# EAGLE board esd_fall_project rev3 (EAGLE 9.6.2)
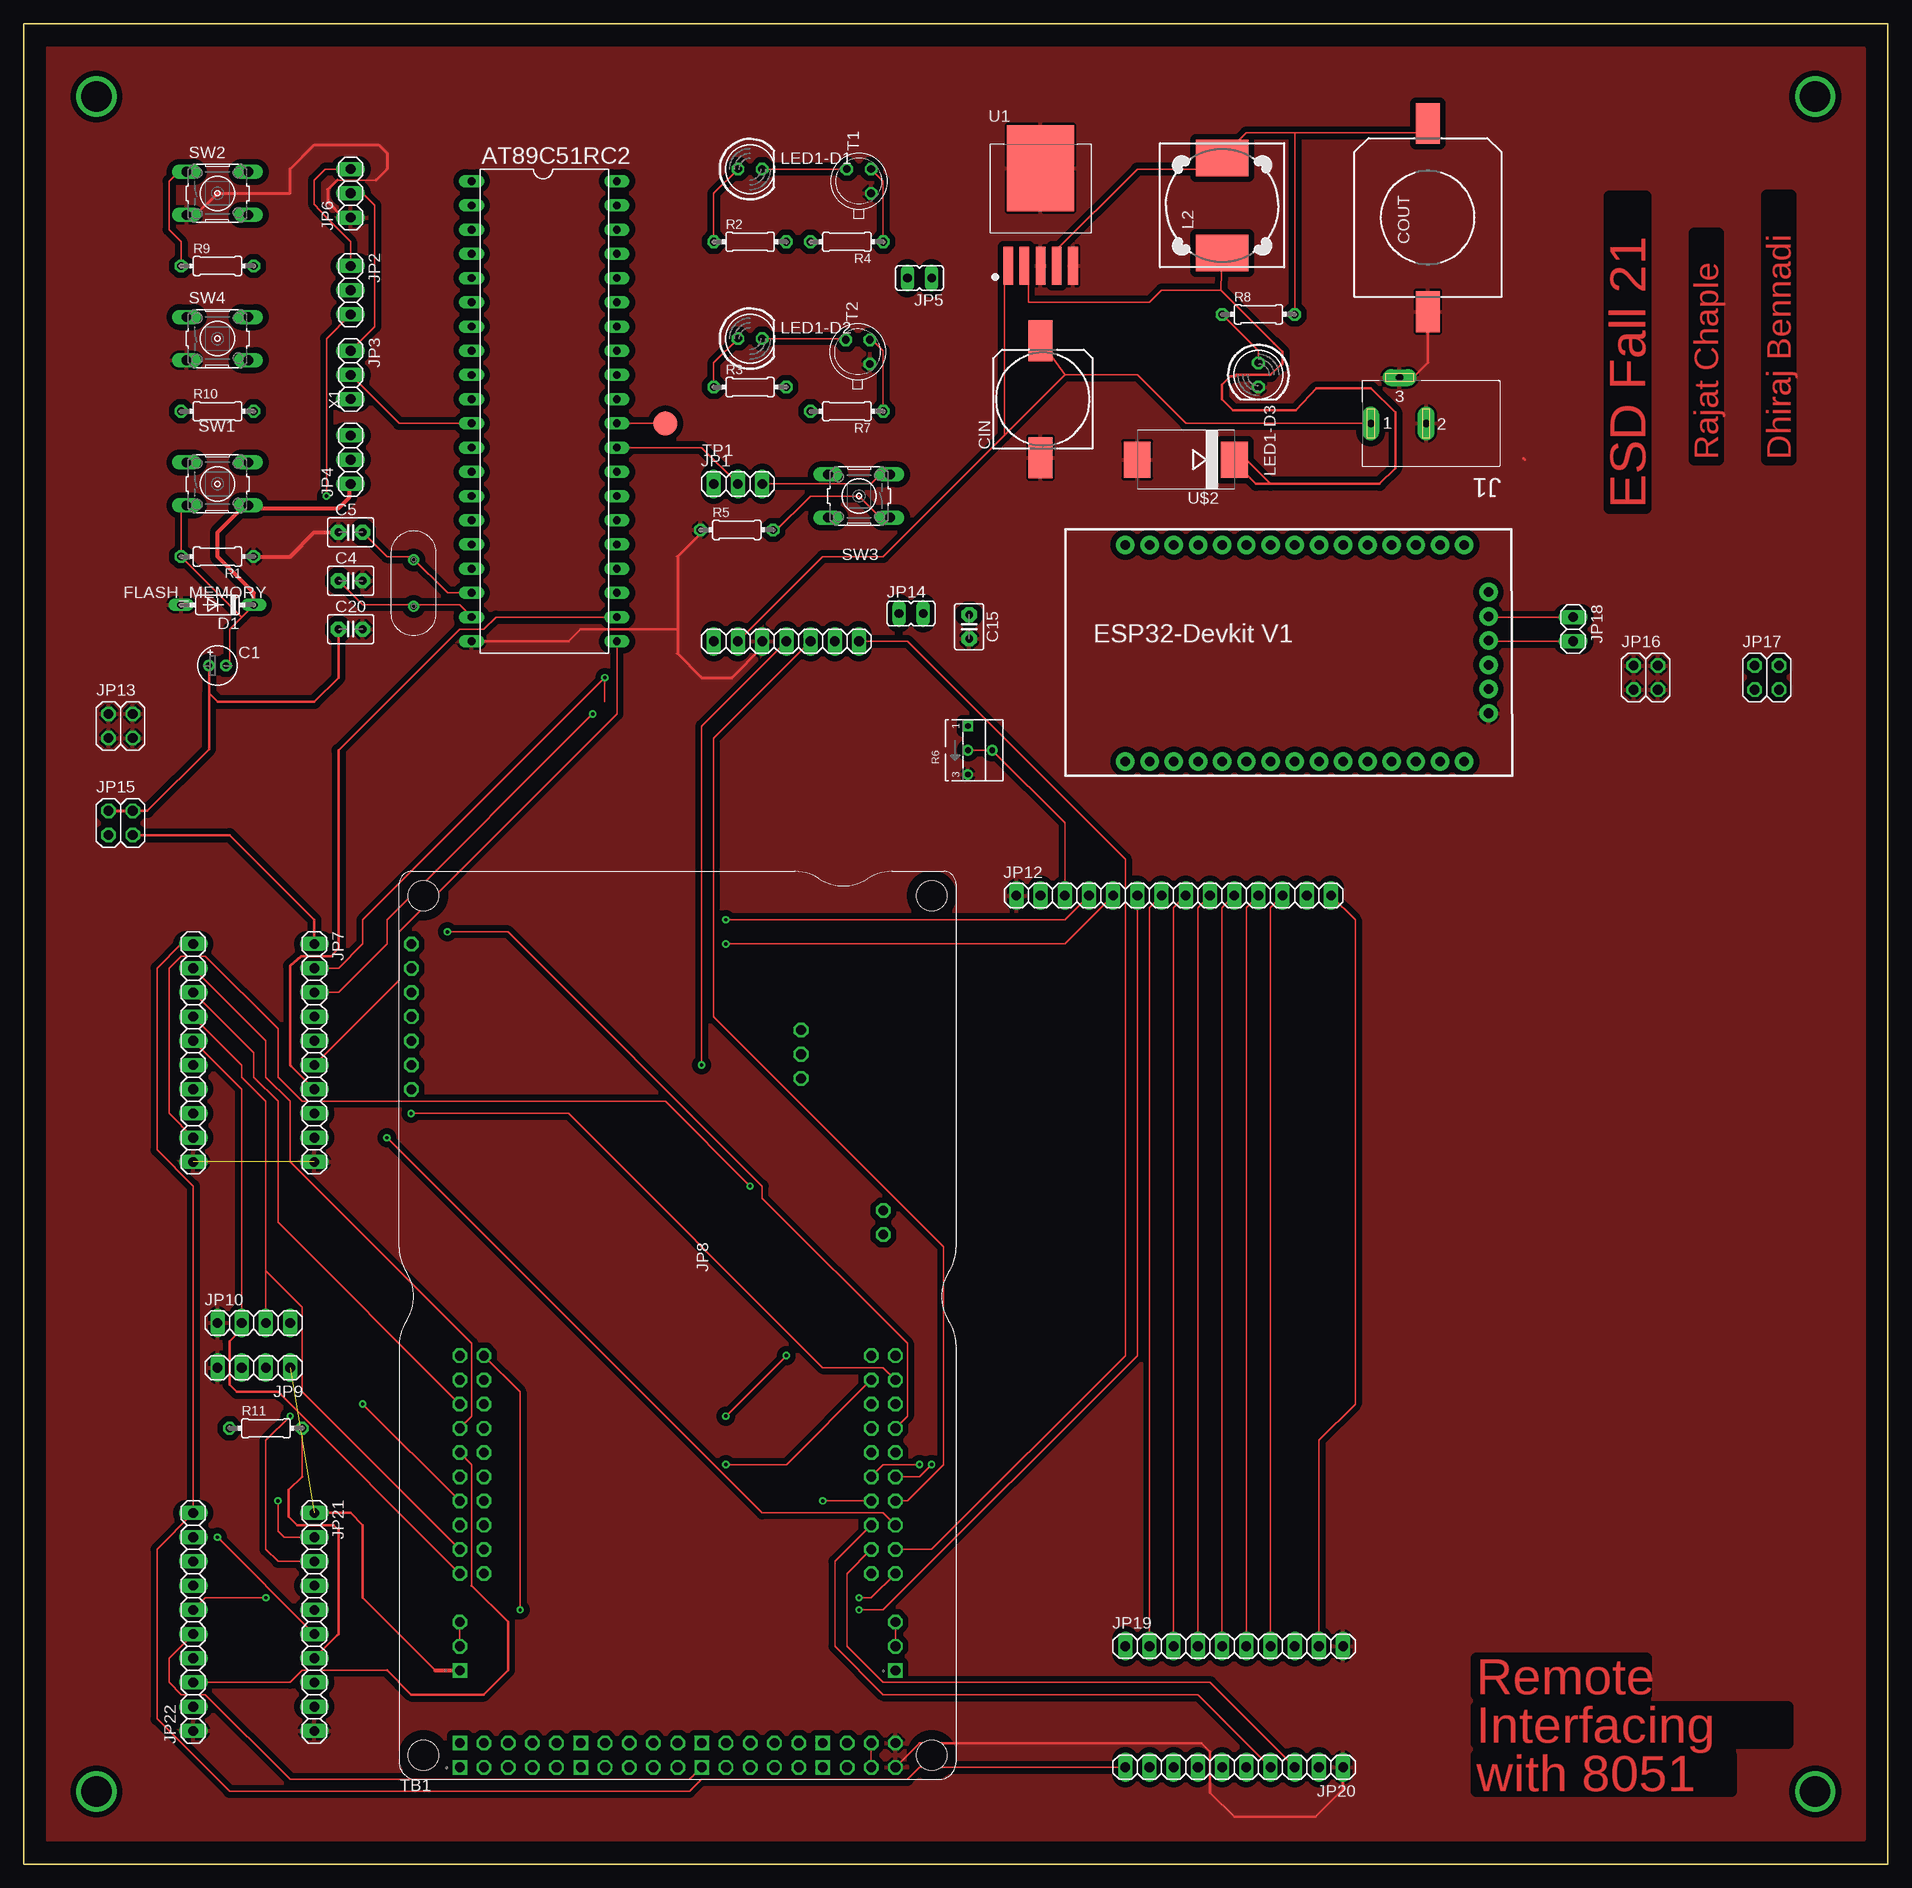
[diagram p0: board, top side]
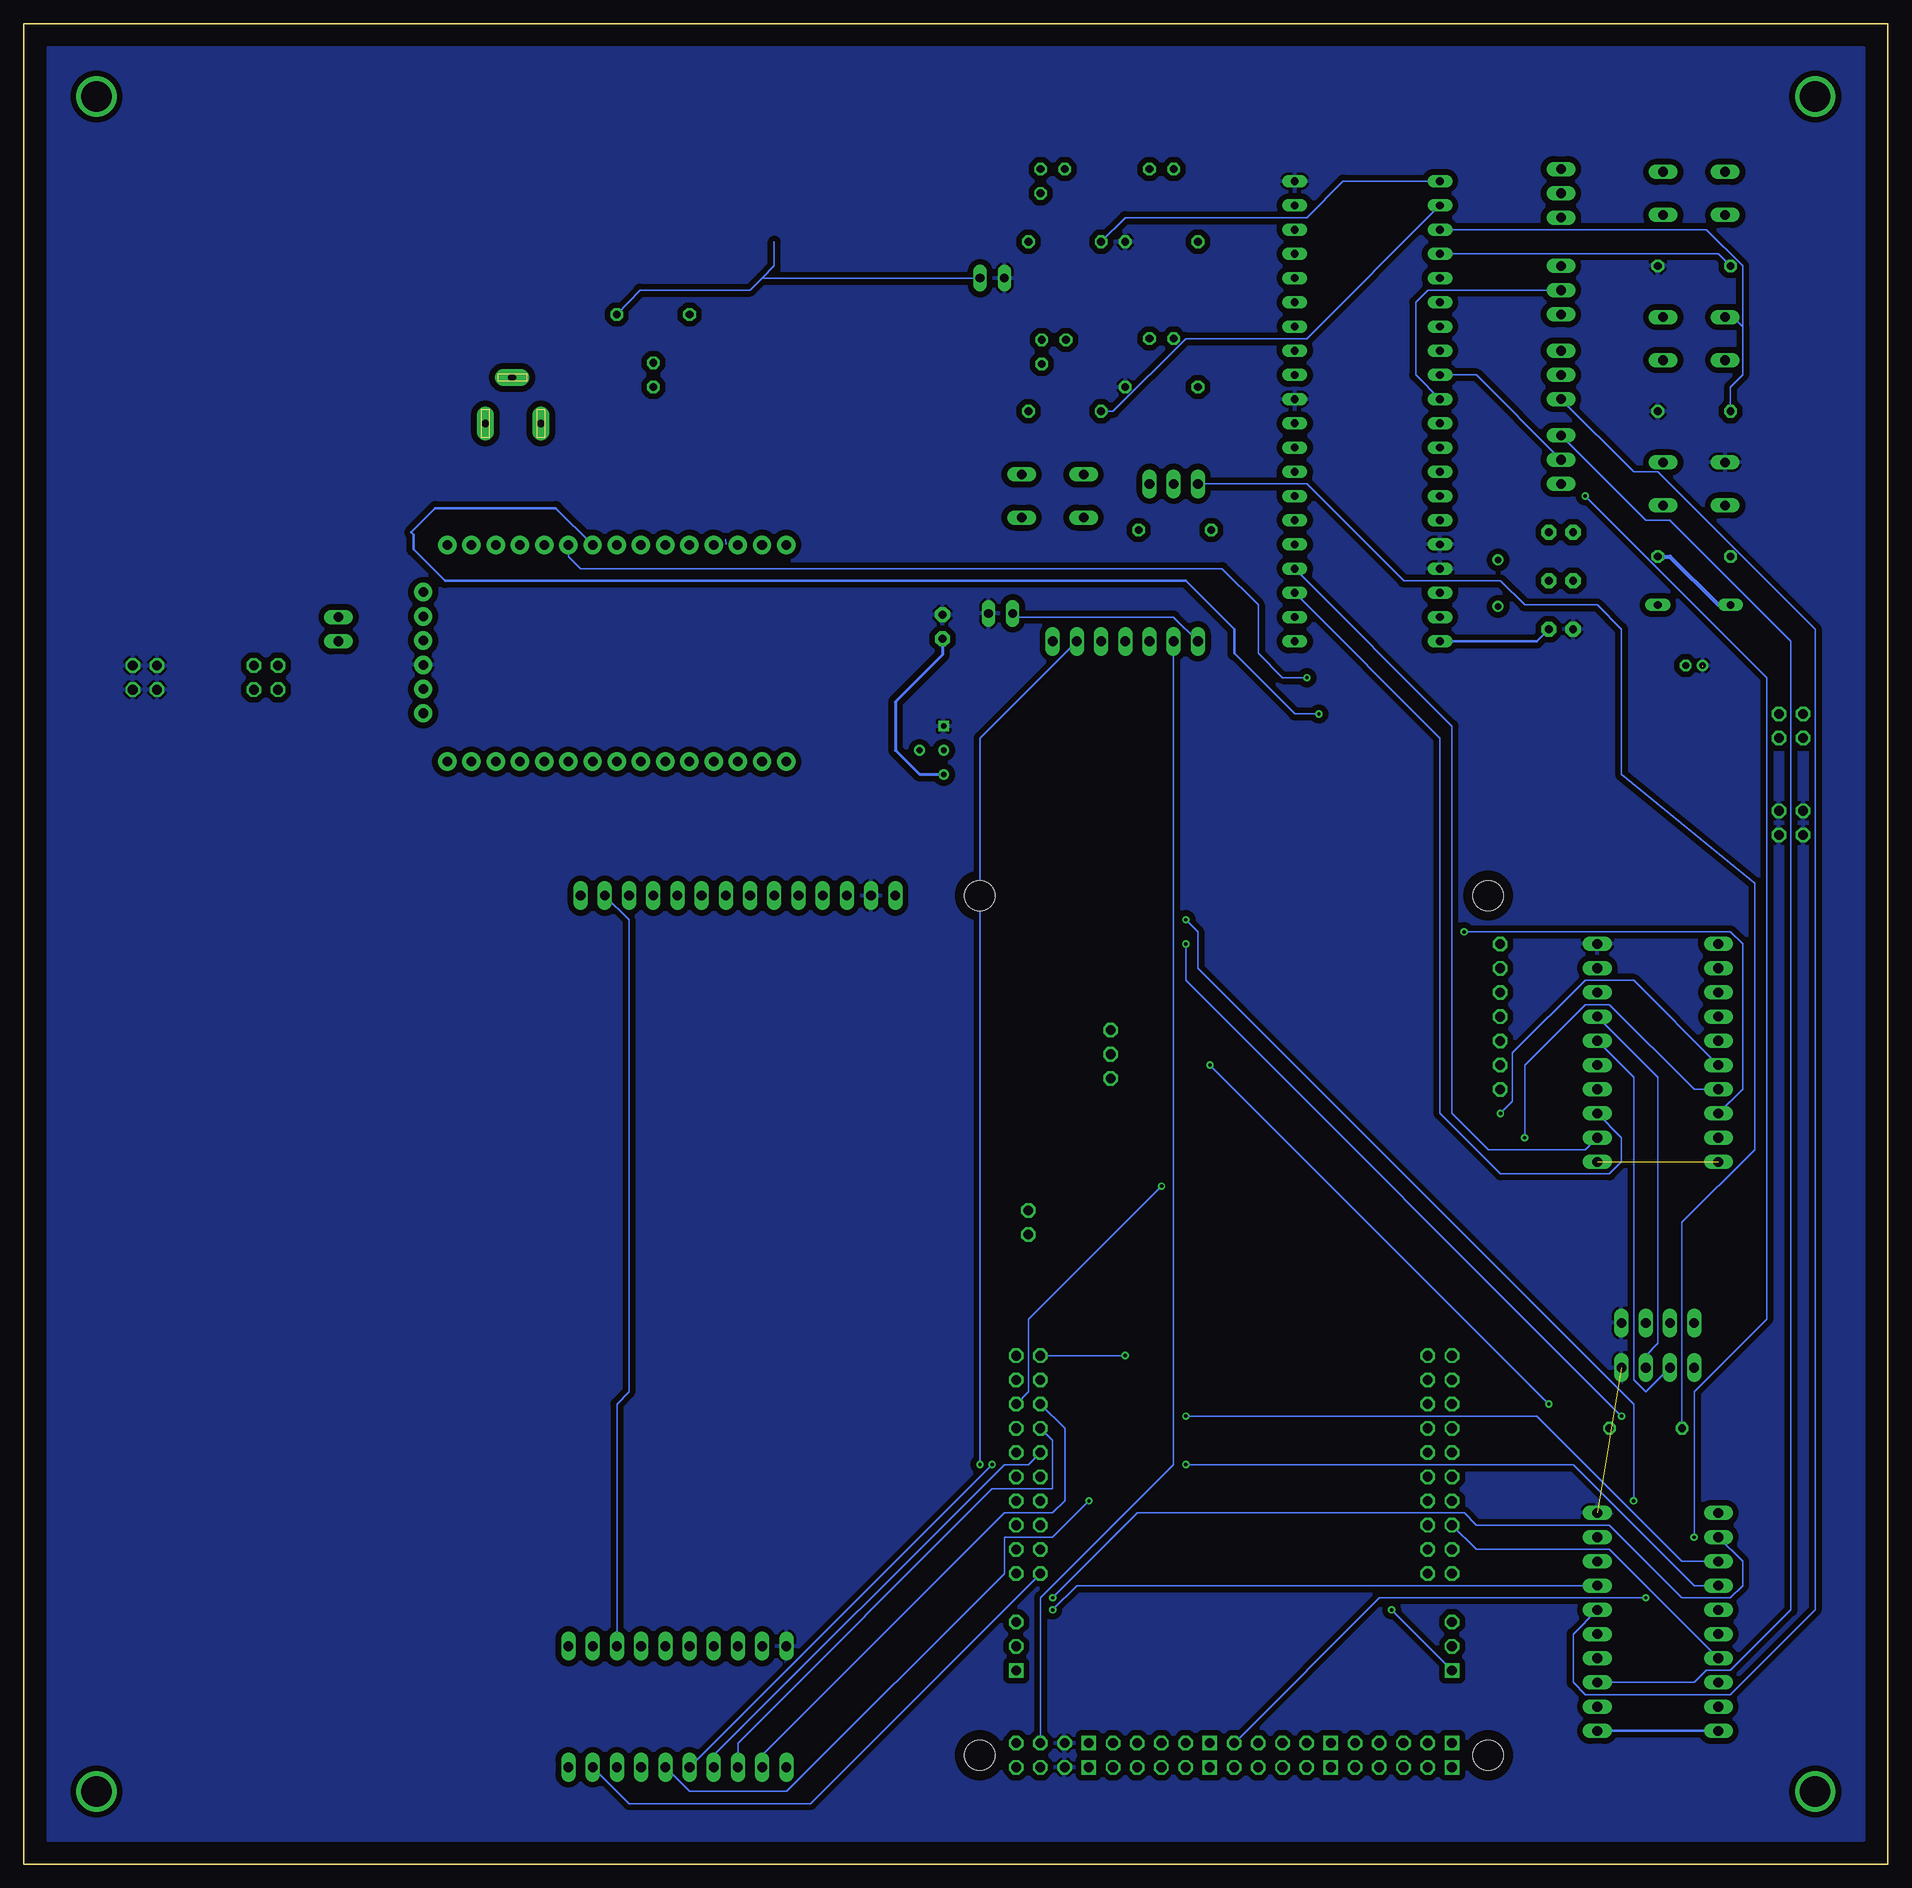
[diagram p1: board, bottom side, seen from below]

Size 195.58 x 193.04 mm. Coordinates in mm from the lower left corner, seen from the top.
Outline: 0,193.04 0,0 195.58,0 195.58,193.04 0,193.04
Copper layers (1*16): Top 0.035mm / dielectric 1.5mm / Bottom 0.035mm
Design rules "default": minimum track width 6mil, minimum drill 0.35mm, track to track 6mil, track to pad 6mil, pad to pad 6mil, via to via 6mil, smd to smd 6mil, copper to edge 40mil, drill to drill 6mil, minimum pad ring 10mil, minimum via ring 8mil, stop-mask expansion 4mil, vias tented up to drill 0mil, thermal gap 10mil
Net classes: 0 default: width 0.025 mm

## Footprints (pad centres in the part's own frame; a part is rotated, then mirrored left to right if it is on the bottom)
DIL40 = drill 0.813 long: 1 -24.13,-7.62; 2 -21.59,-7.62; 3 -19.05,-7.62; 4 -16.51,-7.62; 5 -13.97,-7.62; 6 -11.43,-7.62; 7 -8.89,-7.62; 8 -6.35,-7.62; 9 -3.81,-7.62; 10 -1.27,-7.62; 11 1.27,-7.62; 12 3.81,-7.62; 13 6.35,-7.62; 14 8.89,-7.62; 15 11.43,-7.62; 16 13.97,-7.62; 17 16.51,-7.62; 18 19.05,-7.62; 19 21.59,-7.62; 20 24.13,-7.62; 21 24.13,7.62; 22 21.59,7.62; 23 19.05,7.62; 24 16.51,7.62; 25 13.97,7.62; 26 11.43,7.62; 27 8.89,7.62; 28 6.35,7.62; 29 3.81,7.62; 30 1.27,7.62; 31 -1.27,7.62; 32 -3.81,7.62; 33 -6.35,7.62; 34 -8.89,7.62; 35 -11.43,7.62; 36 -13.97,7.62; 37 -16.51,7.62; 38 -19.05,7.62; 39 -21.59,7.62; 40 -24.13,7.62
E1,8-4 = drill 0.711 pad 1.168: + -0.889,0 | drill 0.711 pad 1.168 octagon: - 0.889,0
C2.5-3 = drill 0.813 pad 1.6 octagon: 1 -1.27,0; 2 1.27,0
153CLV-1014 = smd 4.3 x 2.5: + 4.867,0; - -7.407,0
150CLZ-1010 = smd 4.3 x 2.5: + 9.865,0; - -9.865,0
DO35-7 = drill 0.813 long: A 3.81,0; C -3.81,0
1X07 = drill 1.016 long: 1 -7.62,0; 2 -5.08,0; 3 -2.54,0; 4 0,0; 5 2.54,0; 6 5.08,0; 7 7.62,0
694106301002 = drill 0.8 pad 1.8 long: 1 13.6,0; 2 7.8,0; 3 10.6,-4.8
1X03 = drill 1.016 long: 1 -2.54,0; 2 0,0; 3 2.54,0
JP1 = drill 0.914 long: 1 0,-1.27; 2 0,1.27
1X10 = drill 1.016 long: 1 -11.43,0; 2 -8.89,0; 3 -6.35,0; 4 -3.81,0; 5 -1.27,0; 6 1.27,0; 7 3.81,0; 8 6.35,0; 9 8.89,0; 10 11.43,0
1X04 = drill 1.016 long: 1 -3.81,0; 2 -1.27,0; 3 1.27,0; 4 3.81,0
1X14 = drill 1.016 long: 1 -16.51,0; 2 -13.97,0; 3 -11.43,0; 4 -8.89,0; 5 -6.35,0; 6 -3.81,0; 7 -1.27,0; 8 1.27,0; 9 3.81,0; 10 6.35,0; 11 8.89,0; 12 11.43,0; 13 13.97,0; 14 16.51,0
2X02 = drill 1.016 octagon: 1 -1.27,-1.27; 2 -1.27,1.27; 3 1.27,-1.27; 4 1.27,1.27
1X02 = drill 1.016 long: 1 -1.27,0; 2 1.27,0
DR127 = smd 3.85 x 5.5: 1 -4.975,0; 2 4.975,0
LED5MM = drill 0.813 octagon: A -1.27,0; K 1.27,0
0204/7 = drill 0.813 octagon: 1 -3.81,0; 2 3.81,0
64W = drill 0.6 square: 1 2.54,0 | drill 0.6: 3 -2.54,0; S 0,-2.54; S@1 0,0
B3F-10XX = drill 1.016 long: 1 -3.251,2.261; 2 3.251,2.261; 3 -3.251,-2.261; 4 3.251,-2.261
TO18 = drill 0.813 octagon: 1 -1.27,-1.27; 2 1.27,-1.27; 3 1.27,1.27
SHIELD_MSP-EXP432P401R = drill 1.016 octagon: 1 0.02,43.17; 2 0.02,40.63; 3 0.02,38.09; 4 0.02,35.55; 5 0.02,33.01; 5_3 2.56,-0.01; 5_4 2.56,2.53; 5_5 5.1,-0.01; 5_6 5.1,2.53; 5_7 7.64,-0.01; 5_8 7.64,2.53; 5_9 10.18,-0.01; 5_10 10.18,2.53; 5_13 15.26,-0.01; 5_14 15.26,2.53; 5_15 17.8,-0.01; 5_16 17.8,2.53; 5_17 20.34,-0.01; 5_18 20.34,2.53; 5_19 22.88,-0.01; 5_20 22.88,2.53; 5_23 27.96,-0.01; 5_24 27.96,2.53; 5_25 30.5,-0.01; 5_26 30.5,2.53; 5_27 33.04,-0.01; 5_28 33.04,2.53; 5_29 35.58,-0.01; 5_30 35.58,2.53; 5_33 40.66,-0.01; 5_34 40.66,2.53; 5_35 43.2,-0.01; 5_36 43.2,2.53; 5_37 45.74,-0.01; 5_38 45.74,2.53; 6 0.02,30.47; 6_2 45.74,12.69; 6_3 45.74,15.23; 7 0.02,27.93; 7_2 0.02,12.69; 7_3 0.02,15.23; 8 0.02,25.39; 9 0.02,22.85; 10 0.02,20.31; 11 45.74,20.31; 12 45.74,22.85; 13 45.74,25.39; 14 45.74,27.93; 15 45.74,30.47; 16 45.74,33.01; 17 45.74,35.55; 18 45.74,38.09; 19 45.74,40.63; 20 45.74,43.17; 21 2.56,43.17; 22 2.56,40.63; 23 2.56,38.09; 24 2.56,35.55; 25 2.56,33.01; 26 2.56,30.47; 27 2.56,27.93; 28 2.56,25.39; 29 2.56,22.85; 30 2.56,20.31; 31 43.2,20.31; 32 43.2,22.85; 33 43.2,25.39; 34 43.2,27.93; 35 43.2,30.47; 36 43.2,33.01; 37 43.2,35.55; 38 43.2,38.09; 39 43.2,40.63; 40 43.2,43.17; 102_1 44.47,58.41; 102_2 44.47,55.87; TP101 -5.05,86.35; TP102 -5.05,83.81; TP103 -5.05,81.27; TP104 -5.05,78.73; TP105 -5.05,76.19; TP106 -5.05,73.65; TP107 -5.05,71.11; TP108 35.83,77.33; TP109 35.83,74.79; TP110 35.83,72.25 | drill 1.016 square: 5_1 0.02,-0.01; 5_2 0.02,2.53; 5_11 12.72,-0.01; 5_12 12.72,2.53; 5_21 25.42,-0.01; 5_22 25.42,2.53; 5_31 38.12,-0.01; 5_32 38.12,2.53; 6_1 45.74,10.15; 7_1 0.02,10.15 | hole 3.175: -3.79,91.43; 49.55,91.43; -3.79,1.26; 49.55,1.26
B2,54 = smd 2.54 x 2.54: TP 0,0
DPAK6P170_1524X459L254X81N = smd 1 x 4: 1 -3.4,-6.33; 2 -1.7,-6.33; 3 0,-6.33; 4 1.7,-6.33; 5 3.4,-6.33 | smd 7 x 9: 6 0,3.91
ESP32-DEVKITV1 = drill 1 pad 1.93: 3V -20.33,12.627; BAT -22.87,-10.111; GND1 -22.87,12.627; GND2 -25.41,7.547; IO0 -15.25,-10.111; IO2 -17.79,-10.111; IO4 -12.71,-10.111; IO5 -5.09,-10.111; IO12 -15.25,12.627; IO13 -17.79,12.627; IO14 -12.71,12.627; IO15 -20.33,-10.111; IO16 -10.17,-10.111; IO17 -7.63,-10.111; IO18 -2.55,-10.111; IO19 -0.01,-10.111; IO21 2.53,-10.111; IO22 10.15,-10.111; IO23 12.69,-10.111; IO25 -5.09,12.627; IO26 -7.63,12.627; IO27 -10.17,12.627; IO32 -0.01,12.627; IO33 -2.55,12.627; IO34 5.07,12.627; IO35 2.53,12.627; IO36 10.15,12.627; IO39 7.61,12.627; NC1 -25.41,5.007; NC2 -25.41,-5.153; RST 12.69,12.627; RX0 -25.41,-0.073; RX1 5.07,-10.111; TX0 -25.41,-2.613; TX1 7.61,-10.111; V+ -25.41,2.467
SMC = smd 2.8 x 3.8: A 5.097,0; C -5.097,0
XTAL_HC49 = drill 0.65 pad 1.05: 1 -2.44,0; 2 2.44,0

## Placement (x,y rotation side)
AT89C51RC2  8051P  [DIL40]  54.61,152.4 270 top
C1  [E1,8-4]  20.32,125.73 0 top
C4  27pF  [C2.5-3]  34.29,134.62 0 top
C5  27pF  [C2.5-3]  34.29,139.7 0 top
C15  0.1uF  [C2.5-3]  99.19,129.79 270 top
C20  4.7uF  [C2.5-3]  34.29,129.54 0 top
CIN  100UF  [153CLV-1014]  106.68,154.94 90 top
COUT  1000UF  [150CLZ-1010]  147.32,172.72 90 top
D1  1N4148DO35-7  [DO35-7]  20.32,132.08 180 top
FLASH_MEMORY  [1X07]  80.01,128.27 180 top
J1  694106301002  [694106301002]  154.94,151.13 180 top
JP1  [1X03]  74.93,144.78 0 top
JP2  [1X03]  34.29,165.1 270 top
JP3  [1X03]  34.29,156.21 270 top
JP4  [1X03]  34.29,147.32 90 top
JP5  [JP1]  93.98,166.37 90 top
JP6  [1X03]  34.29,175.26 90 top
JP7  [1X10]  30.48,85.09 270 top
JP8  [1X10]  17.78,85.09 90 top
JP9  [1X04]  24.13,52.07 180 top
JP10  [1X04]  24.13,56.77 0 top
JP12  [1X14]  120.65,101.6 0 top
JP13  [2X02]  10.16,119.38 0 top
JP14  [JP1]  93.09,131.19 270 top
JP15  [2X02]  10.16,109.22 0 top
JP16  [2X02]  170.18,124.46 0 top
JP17  [2X02]  182.88,124.46 0 top
JP18  [1X02]  162.56,129.54 270 top
JP19  [1X10]  127,22.86 0 top
JP20  [1X10]  127,10.16 180 top
JP21  [1X10]  30.48,25.4 270 top
JP22  [1X10]  17.78,25.4 90 top
L2  100uH  [DR127]  125.73,173.99 90 top
LED1-D1  [LED5MM]  76.2,177.8 0 top
LED1-D2  [LED5MM]  76.2,160.02 0 top
LED1-D3  [LED5MM]  129.54,156.21 270 top
R1  330  [0204/7]  20.32,137.16 180 top
R2  330  [0204/7]  76.2,170.18 0 top
R3  330  [0204/7]  76.2,154.94 0 top
R4  5kohm  [0204/7]  86.36,170.18 180 top
R5  330  [0204/7]  74.8,139.95 0 top
R6  20K  [64W]  99.06,116.84 90 top
R7  5kohm  [0204/7]  86.36,152.4 180 top
R8  330  [0204/7]  129.54,162.56 0 top
R9  4.7k  [0204/7]  20.32,167.64 0 top
R10  4.7k  [0204/7]  20.32,152.4 0 top
R11  330  [0204/7]  25.4,45.72 0 top
SW1  SPST  [B3F-10XX]  20.32,144.78 0 top
SW2  SPST  [B3F-10XX]  20.32,175.26 0 top
SW3  SPST  [B3F-10XX]  87.63,143.51 180 top
SW4  SPST  [B3F-10XX]  20.32,160.02 0 top
T1  2N2222  [TO18]  87.63,176.53 90 top
T2  2N2222  [TO18]  87.5,158.62 90 top
TB1  MSP-EXP432P401R  [SHIELD_MSP-EXP432P401R]  45.72,10.16 0 top
TP1  PTR1B2,54  [B2,54]  67.31,151.13 0 top
U1  LM2576-5.0WU  [DPAK6P170_1524X459L254X81N]  106.68,173.99 0 top
U$1  ESP32DEVKITV1  [ESP32-DEVKITV1]  128.27,128.27 180 top
U$2  SL42-SCHOTTKY  [SMC]  121.92,147.32 180 top
X1  49S/18PF  [XTAL_HC49]  40.89,134.37 270 top

## Library data of the parts
AT89C51RC2 = micro-intel; OC_FARNELL: unknown; OC_NEWARK: unknown
C1 R1-R5 R7-R11 = rcl
C4 C5 C15 C20 = capacitor-wima
CIN COUT U$2 = ESD_project
D1 = diode
FLASH_MEMORY JP1-JP4 JP6-JP10 JP12 JP13 JP15-JP22 = pinhead
J1 = DC Power Jacks; CREATED_BY: PCBLayout.com; DIGIKEY_PART_NUMBER: 732-5930-ND; MANUFACTURER: Wurth Electronics Inc.; MPN: 694106301002
JP5 JP14 = jumper
L2 = inductors
LED1-D1-LED1-D3 = led
R6 = potentiometers
SW1-SW4 = switch-omron; MPN: B3F-1000; OC_FARNELL: 176432; OC_NEWARK: 36M3542
T1 T2 = transistor
TB1 = msp432; AVAILABILITY: In Stock; DESCRIPTION: SimpleLink™ MSP432P401R high-precision ADC LaunchPad™ Development Kit; MF: Texas Instruments; MP: MSP-EXP432P401R; PACKAGE: None; PRICE: None; PURCHASE-URL: https://pricing.snapeda.com/search/part/MSP-EXP432P401R/?ref=eda
TP1 = testpad
U1 = LM2576-5.0WU; AVAILABILITY: In Stock; DESCRIPTION: Buck Switching Regulator IC Positive Fixed 5V 1 Output 3A TO-263-6, D²Pak (5 Leads + Tab), TO-263BA; MF: Microchip; MP: LM2576-5.0WU-TR; PACKAGE: TO-263-5 Microchip; PRICE: None; PURCHASE-URL: https://pricing.snapeda.com/search/part/LM2576-5.0WU-TR/?ref=eda
U$1 = ESP32-DEVKITV1
X1 = Crystals_Oscillators; CREATED_BY: PCBLayout.com; MANUFACTURER: Xinhunjing; MPN: 49S/18PF; PACKAGE: SMD

## Nets
3.3V: JP8.10 JP20.10 JP22.10
3V3: TB1.6_1
5V: TB1.7_1 TB1.21
9: AT89C51RC2.9 JP4.2
/PSEN_CMOS: JP21.7 R11.2
/PSEN_TTL: JP22.4 TB1.8
ALE: AT89C51RC2.30 TP1.TP
ESP32_RX_CMOS: JP7.2 U$1.IO16
ESP32_RX_TTL: JP8.9 TB1.4
ESP32_TX_CMOS: JP7.3 U$1.IO17
ESP32_TX_TTL: JP8.8 TB1.3
FLASH_CS: FLASH_MEMORY.1 TB1.12
GND: AT89C51RC2.20 C4.2 C5.1 C15.2 C20.2 CIN.- COUT.- D1.A FLASH_MEMORY.5 J1.2 J1.3 JP6.1 JP7.10 JP8.1 JP9.4 JP10.1 JP12.1 JP13.1 JP13.2 JP13.3 JP13.4 JP16.1 JP16.2 JP16.3 JP16.4 JP19.10 JP20.1 JP21.10 JP22.1 LED1-D3.K R1.1 R5.1 R6.3 SW2.3 SW4.3 T1.1 T2.1 TB1.5_37 TB1.5_38 U1.3 U1.5 U1.6 U$1.GND2 U$2.A
GND_6: TB1.6_2 TB1.6_3
GND_7: TB1.7_2 TB1.7_3
GND_J3: TB1.22
GPIO0_CMOS: AT89C51RC2.21 JP7.6
GPIO0_TTL: JP8.5 TB1.19
GPIO1_CMOS: AT89C51RC2.22 JP7.7
GPIO1_TTL: JP8.4 TB1.13
GPIO2_CMOS: AT89C51RC2.23 JP7.8
GPIO2_TTL: JP8.3 TB1.17
GPIO3_CMOS: AT89C51RC2.24 JP7.9
GPIO3_TTL: JP8.2 TB1.18
LCD_D0_CMOS: JP12.7 JP19.2
LCD_D0_TTL: JP20.9 TB1.38
LCD_D1_CMOS: JP12.8 JP19.3
LCD_D1_TTL: JP20.8 TB1.37
LCD_D2_CMOS: JP12.9 JP19.4
LCD_D2_TTL: JP20.7 TB1.36
LCD_D3_CMOS: JP12.10 JP19.5
LCD_D3_TTL: JP20.6 TB1.35
LCD_D4_CMOS: JP12.11 JP19.6
LCD_D4_TTL: JP20.5 TB1.34
LCD_D5_CMOS: JP12.12 JP19.7
LCD_D5_TTL: JP20.4 TB1.33
LCD_D6_CMOS: JP12.13 JP19.8
LCD_D6_TTL: JP20.3 TB1.32
LCD_D7_CMOS: JP12.14 JP19.9
LCD_D7_TTL: JP20.2 TB1.31
LCD_E_CMOS: JP12.6 JP21.4
LCD_E_TTL: JP22.7 TB1.39
LCD_RS_CMOS: JP12.4 JP21.2
LCD_RS_TTL: JP22.9 TB1.11
LCD_RW_CMOS: JP12.5 JP21.3
LCD_RW_TTL: JP22.8 TB1.40
LED0: AT89C51RC2.1 R4.2
LED1: AT89C51RC2.2 R7.2
MISO: FLASH_MEMORY.3 TB1.14
MOSI: FLASH_MEMORY.2 TB1.15
N$1: R7.1 T2.2
N$2: LED1-D2.A R3.1
N$3: COUT.+ JP5.1 L2.2 R8.2 U1.4
N$4: L2.1 U1.2 U$2.C
N$5: JP2.1 JP6.3
N$6: JP3.1 JP6.2
N$7: R4.1 T1.2
N$8: AT89C51RC2.19 C4.1 X1.2
N$9: AT89C51RC2.18 C5.2 X1.1
N$10: LED1-D1.A R2.1
N$11: LED1-D3.A R8.1
N$13: AT89C51RC2.29 JP1.2
N$14: JP18.2 U$1.RX0
N$15: LED1-D1.K T1.3
N$16: JP18.1 U$1.TX0
N$17: LED1-D2.K T2.3
N$18: FLASH_MEMORY.7 JP14.1
N$23: TB1.20
N$35: R5.2 SW3.1
N$36: JP1.3 SW3.3
N$365: JP1.1 R11.1
RST: C1.- D1.C JP4.1 R1.2 SW1.3
RST51_CMOS: JP4.3 JP21.8
RST51_TTL: JP22.3 TB1.5
RXD: AT89C51RC2.10 JP2.2
SCK_CMOS: JP7.4 JP9.2
SCK_TTL: JP8.7 JP10.3 TB1.9
SCLK: FLASH_MEMORY.4 TB1.7
SDA_CMOS: JP7.5 JP9.3
SDA_TTL: JP8.6 JP10.2 TB1.10
SW0: AT89C51RC2.3 R10.1 SW4.1
SW1: AT89C51RC2.4 R9.1 SW2.1
TXD: AT89C51RC2.11 JP3.2
UART51_RX_CMOS: JP3.3 JP21.5
UART51_RX_TTL: JP22.6 TB1.5_20
UART51_TX_CMOS: JP2.3 JP21.6
UART51_TX_TTL: JP22.5 TB1.5_21
V_RES: JP12.3 R6.S R6.S@1
VCC: AT89C51RC2.16 AT89C51RC2.17 AT89C51RC2.31 AT89C51RC2.40 C1.+ C15.1 C20.1 JP5.2 JP7.1 JP9.1 JP10.4 JP12.2 JP14.2 JP15.1 JP15.2 JP15.3 JP15.4 JP17.1 JP17.2 JP17.3 JP17.4 JP19.1 JP21.1 R2.2 R3.2 R6.1 R9.2 R10.2 SW1.1 TB1.5_33 TB1.5_34 U$1.V+
VDD: CIN.+ FLASH_MEMORY.6 J1.1 TB1.5_35 TB1.5_36 U1.1

## Tracks (layer width: path | path; a pad name or v marks a point on that pad's centre or on a via)
3.3V
  Top 0.152: JP20.10 93.98,10.16 92.71,8.89 71.12,8.89 69.85,7.62 21.59,7.62 13.97,15.24 13.97,33.02 JP22.10 17.78,71.12 13.97,74.93 13.97,93.98 16.51,96.52 JP8.10
5V  (via drill 0.35)
  Top 0.152: v52.07,26.67 52.07,49.53 48.26,53.34 TB1.21
  Bottom 0.152: v52.07,26.67 45.72,20.32 TB1.7_1
9
  Bottom 0.152: AT89C51RC2.9 43.18,156.21 JP4.2
/PSEN_CMOS
  Top 0.152: 29.21,40.64 R11.2 | JP21.7 32.89,24
  Top 0.254: 29.21,40.64 27.81,39.24 27.81,36.45 28.7,35.56 32.51,35.56 33.02,35.05 33.02,24.13 32.89,24
/PSEN_TTL
  Bottom 0.152: JP22.4 29.21,33.02 43.18,33.02 45.72,35.56 TB1.8
ALE
  Top 0.152: AT89C51RC2.30 TP1.TP
ESP32_RX_CMOS  (via drill 0.35)
  Top 0.152: 60.96,121.92 v60.96,124.46 35.56,99.06 35.56,96.52 33.02,93.98 JP7.2
  Bottom 0.152: v60.96,124.46 63.5,124.46 66.04,127 66.04,132.08 69.85,135.89 137.16,135.89 138.43,137.16 138.43,138.43 U$1.IO16
ESP32_RX_TTL
  Top 0.152: JP8.9 25.4,86.36 25.4,82.55 27.94,80.01 27.94,73.66 46.99,54.61 46.99,46.99 45.72,45.72 TB1.4
ESP32_TX_CMOS  (via drill 0.35)
  Top 0.152: v59.69,120.65 38.1,99.06 38.1,96.52 33.02,91.44 JP7.3
  Bottom 0.152: v59.69,120.65 62.23,120.65 68.58,127
  Bottom 0.254: 68.58,127 68.58,129.54 73.66,134.62 151.38,134.62 154.69,137.92 154.69,139.45 154.94,139.7 152.4,142.24 139.76,142.24 U$1.IO17
ESP32_TX_TTL
  Top 0.152: JP8.8 24.13,85.09 24.13,82.55 26.67,80.01 26.67,67.31 45.72,48.26 TB1.3
FLASH_CS
  Top 0.152: FLASH_MEMORY.1 92.71,128.27 115.57,105.41 115.57,53.34 95.25,33.02 91.44,33.02 TB1.12
GND  (1 unrouted)
  Top 0.152: JP6.1 34.24,172.67
  Top 0.155: 36.96,176.66 32.89,176.66
  Top 0.254: TB1.5_37 91.46,10.18 93.98,12.7 123.57,12.7 124.46,11.81 124.46,7.49 127,4.95 135.51,4.95 138.43,7.87 JP20.1 | AT89C51RC2.20 57.15,128.27 58.42,129.54 68.58,129.54 | 157.35,147.45 157.48,147.32 | J1.3 145.77,155.93 147.32,157.48 147.32,162.56
  Top 0.305: SW2.3 18.06,173 20.32,175.26 27.94,175.26 27.94,177.8 30.48,180.34 37.21,180.34 38.1,179.45 38.1,177.8 36.96,176.66 | 32.89,176.66 31.88,175.64 31.88,174.37 33.53,172.72 JP6.1 | R5.1 70.99,139.57 68.58,137.16 68.58,129.54 68.58,127 71.12,124.46 74.3,124.46 77.47,127.63 FLASH_MEMORY.5
  Top 0.406: R1.1 27.94,137.16 30.48,139.7 C5.1
  Bottom 0.254: AT89C51RC2.20 36.83,128.27 C20.2 | JP22.1 JP21.10
  Bottom 0.305: C15.2 99.19,126.87 104.14,121.92 104.14,116.84 101.6,114.3 R6.3
  Bottom 0.406: D1.A 17.78,132.08 22.86,137.16 R1.1
  pour Top (isolate 0.61): 2.54,190.5 193.04,190.5 193.04,2.54 2.54,2.54
GND_6
  Top 0.152: TB1.6_2 91.44,22.86 91.44,25.4 TB1.6_3
GND_7
  Top 0.152: TB1.7_2 45.72,22.86 45.72,25.4 TB1.7_3
GPIO0_CMOS
  Top 0.152: AT89C51RC2.21 62.23,120.65 39.37,97.79 39.37,92.71 JP7.6
GPIO0_TTL  (via drill 0.35)
  Top 0.152: v40.64,78.74 57.15,78.74 83.82,52.07 90.17,52.07 91.44,50.8 TB1.19
  Bottom 0.152: v40.64,78.74 39.37,80.01 39.37,85.09 31.75,92.71 26.67,92.71 JP8.5
GPIO1_CMOS
  Top 0.152: AT89C51RC2.22 49.53,130.81 48.26,129.54 45.72,129.54 33.02,116.84 | JP7.7 28.07,83.69
  Top 0.254: 33.02,116.84 33.02,96.14 32.26,95.25 29.08,95.25 27.94,94.23 27.94,83.82 28.07,83.69
GPIO1_TTL  (via drill 0.35)
  Top 0.152: TB1.13 91.44,35.56 90.17,36.83 77.47,36.83 v38.1,76.2
  Bottom 0.152: JP8.4 20.32,81.28 29.21,90.17 31.75,90.17 38.1,83.82 v38.1,76.2
GPIO2_CMOS
  Bottom 0.152: AT89C51RC2.23 46.99,118.11 46.99,78.74 40.64,72.39 29.21,72.39 27.94,73.66 27.94,76.2 JP7.8
GPIO2_TTL  (via drill 0.35)
  Top 0.152: TB1.17 91.44,45.72 92.71,46.99 92.71,54.61 77.47,69.85 77.47,71.12 50.8,97.79 v44.45,97.79
  Bottom 0.152: JP8.3 15.24,81.28 15.24,96.52 16.51,97.79 v44.45,97.79
GPIO3_CMOS
  Bottom 0.152: AT89C51RC2.24 45.72,119.38 45.72,78.74 41.91,74.93 31.75,74.93 JP7.9
GPIO3_TTL  (via drill 0.35)
  Top 0.152: JP8.2 15.24,78.74 15.24,93.98 16.51,95.25 19.05,95.25 26.67,87.63 26.67,82.55 29.21,80.01 67.31,80.01 v76.2,71.12
  Bottom 0.152: v76.2,71.12 90.17,57.15 90.17,49.53 91.44,48.26 TB1.18
LCD_D0_CMOS
  Top 0.152: JP19.2 118.11,100.33 JP12.7
LCD_D0_TTL
  Bottom 0.152: JP20.9 118.11,11.43 92.71,36.83 87.63,36.83 86.36,38.1 86.36,45.72 88.9,48.26 TB1.38
LCD_D1_CMOS
  Top 0.152: JP19.3 120.65,100.33 JP12.8
LCD_D1_TTL
  Bottom 0.152: JP20.8 120.65,12.7 93.98,39.37 87.63,39.37 87.63,44.45 88.9,45.72 TB1.37
LCD_D2_CMOS
  Top 0.152: JP19.4 123.19,100.33 JP12.9
LCD_D2_TTL
  Bottom 0.152: JP20.7 123.19,11.43 92.71,41.91 90.17,41.91 88.9,43.18 TB1.36
LCD_D3_CMOS
  Top 0.152: JP19.5 125.73,100.33 JP12.10
LCD_D3_TTL  (via drill 0.35)
  Top 0.152: v93.98,41.91 90.17,41.91 88.9,40.64 TB1.35
  Bottom 0.152: v93.98,41.91 JP20.6
LCD_D4_CMOS
  Top 0.152: JP19.6 128.27,100.33 JP12.11
LCD_D4_TTL  (via drill 0.35)
  Top 0.152: v83.82,38.1 88.9,38.1 TB1.34
  Bottom 0.152: JP20.5 125.73,7.62 115.57,7.62 92.71,30.48 92.71,34.29 87.63,34.29 v83.82,38.1
LCD_D5_CMOS
  Top 0.152: JP19.7 130.81,100.33 JP12.12
LCD_D5_TTL
  Top 0.152: JP20.4 123.19,17.78 90.17,17.78 85.09,22.86 85.09,31.75 88.9,35.56 TB1.33
LCD_D6_CMOS
  Bottom 0.152: JP19.8 133.35,48.26 132.08,49.53 132.08,99.06 JP12.13
LCD_D6_TTL
  Top 0.152: JP20.3 124.46,19.05 90.17,19.05 86.36,22.86 86.36,30.48 88.9,33.02 TB1.32
LCD_D7_CMOS
  Top 0.152: JP19.9 135.89,44.45 139.7,48.26 139.7,99.06 JP12.14
LCD_D7_TTL
  Bottom 0.152: JP20.2 132.08,6.35 113.03,6.35 88.9,30.48 TB1.31
LCD_E_CMOS  (via drill 0.35)
  Top 0.152: v87.63,26.67 90.17,26.67 116.84,53.34 JP12.6
  Bottom 0.152: v87.63,26.67 85.09,29.21 JP21.4
LCD_E_TTL  (via drill 0.35)
  Top 0.152: TB1.39 88.9,50.8 80.01,41.91 v73.66,41.91
  Bottom 0.152: JP22.7 20.32,29.21 33.02,41.91 v73.66,41.91
LCD_RS_CMOS  (via drill 0.35)
  Top 0.152: v73.66,99.06 109.22,99.06 JP12.4 | v26.67,38.1 26.67,34.92 27.3,34.29 JP21.2
  Bottom 0.152: v26.67,38.1 26.67,48.26 72.39,93.98 72.39,97.79 v73.66,99.06
LCD_RS_TTL  (via drill 0.35)
  Top 0.152: v87.63,27.94 88.9,27.94 91.44,30.48 TB1.11
  Bottom 0.152: JP22.9 15.24,31.75 15.24,29.21 16.51,27.94 21.59,27.94 29.21,35.56 43.18,35.56 44.45,36.83 78.74,36.83 v87.63,27.94
LCD_RW_CMOS  (via drill 0.35)
  Top 0.152: v73.66,96.52 109.22,96.52 JP12.5 | JP21.3 26.67,31.75 25.4,33.02 25.4,44.45 v27.94,46.99
  Bottom 0.152: v27.94,46.99 73.66,92.71 v73.66,96.52
LCD_RW_TTL  (via drill 0.35)
  Top 0.152: v80.01,53.34 v73.66,46.99
  Bottom 0.152: v80.01,53.34 88.9,53.34 TB1.40 | JP22.8 21.59,31.75 36.83,46.99 v73.66,46.99
LED0
  Bottom 0.152: AT89C51RC2.1 57.15,176.53 60.96,172.72 80.01,172.72 R4.2
LED1
  Bottom 0.152: AT89C51RC2.2 60.96,160.02 73.66,160.02 81.28,152.4 R7.2
MISO
  Top 0.152: FLASH_MEMORY.3 72.39,118.11 72.39,88.9 96.52,64.77 96.52,41.91 92.71,38.1 91.44,38.1 TB1.14
MOSI  (via drill 0.35)
  Top 0.152: v95.25,41.91 93.98,40.64 91.44,40.64 TB1.15
  Bottom 0.152: v95.25,41.91 95.25,118.11 FLASH_MEMORY.2
N$1
  Top 0.152: R7.1 90.17,158.75 88.9,160.02 T2.2
N$2
  Top 0.152: R3.1 72.39,157.48 LED1-D2.A
N$3
  Top 0.152: U1.4 107.95,168.91 116.84,177.8 125.73,177.8 L2.2 125.73,179.07 128.27,181.61 133.35,181.61 | 133.35,181.61 147.32,181.61 COUT.+ | 133.35,181.61 R8.2
  Bottom 0.152: 118.11,166.37 119.38,165.1 130.94,165.1 R8.2 | 118.11,166.37 116.84,167.64 116.84,170.18 | 118.11,166.37 JP5.1
N$4
  Top 0.152: 125.6,165.1 125.73,168.91 L2.1 | 125.6,165.1 131.19,159.51 | 125.6,165.1 119.38,165.1 118.11,163.83 105.41,163.83 105.41,167.64 U1.2 | 130.81,144.78 128.27,147.32 U$2.C
  Top 0.254: 131.19,159.51 132.08,158.62 132.08,157.35 131.95,157.23 131.83,157.23 130.81,156.21 127.25,156.21 127.13,156.08 126.62,156.08 125.73,155.19 125.73,153.67 126.87,152.53 133.48,152.53 135.64,154.81 141.35,154.81 143.89,152.27 143.89,146.43 142.24,144.78 130.81,144.78 129.29,144.78 126.87,147.19
N$5
  Top 0.152: JP2.1 34.29,170.18 31.75,172.72 30.48,174.12 30.48,176.66 31.62,177.8 JP6.3
N$6
  Top 0.152: JP3.1 36.83,161.29 36.83,173.99 35.56,175.26 JP6.2
N$7
  Top 0.152: R4.1 90.17,176.53 T1.2
N$8
  Top 0.152: 40.64,132.08 45.72,132.08 AT89C51RC2.19 | C4.1 35.56,132.08 40.64,132.08 | 40.64,132.08 X1.2
N$9
  Top 0.152: 40.64,137.16 38.1,137.16 C5.2 | AT89C51RC2.18 44.45,133.35 40.64,137.16 | 40.64,137.16 X1.1
N$10
  Top 0.152: R2.1 72.39,175.26 LED1-D1.A
N$11
  Top 0.152: LED1-D3.A 129.54,158.75 R8.1
N$12  (via drill 3.2)
  other vias: 7.62,185.42
N$13
  Top 0.152: AT89C51RC2.29 71.12,148.59 JP1.2
N$14
  Top 0.152: JP18.2 153.67,128.27 U$1.RX0
N$15
  Top 0.152: T1.3 LED1-D1.K
N$16
  Top 0.152: JP18.1 153.67,130.81 U$1.TX0
N$17
  Top 0.152: LED1-D2.K 86.36,160.02 T2.3
N$18
  Bottom 0.152: FLASH_MEMORY.7 74.93,130.81 91.44,130.81 JP14.1
N$19  (via drill 3.2)
  other vias: 187.96,7.62
N$20  (via drill 3.2)
  other vias: 187.96,185.42
N$21  (via drill 3.2)
  other vias: 7.62,7.62
N$22
  Bottom 0.152: 121.92,138.43 121.93,138.97
N$35
  Top 0.152: R5.2 78.74,139.7 82.55,143.51 87.63,143.51 90.17,140.97 SW3.1
N$36
  Top 0.152: JP1.3 88.9,144.78 90.17,146.05 SW3.3
N$365
  Bottom 0.152: JP1.1 60.96,144.78 50.8,134.62 40.64,134.62 38.1,132.08 30.48,132.08 27.94,129.54 27.94,114.3 13.97,102.87 13.97,74.93 21.59,67.31 R11.1
RST
  Top 0.152: D1.C 22.86,130.81 | 22.86,130.81 21.59,129.54 21.59,125.73 C1.- | 17.78,142.24 SW1.3 16.51,142.24 R1.2 22.86,130.81
  Top 0.406: D1.C 24.13,133.35 20.32,137.16 20.32,139.7 22.86,142.24 33.02,142.24 34.16,143.38 34.16,144.65 JP4.1
RST51_CMOS
  Bottom 0.152: JP21.8 20.32,19.05 19.05,20.32 16.51,20.32 10.16,26.67 10.16,128.27 22.86,140.97 25.4,140.97 JP4.3
RST51_TTL
  Top 0.152: JP22.3 27.94,19.05 29.21,20.32 38.1,20.32 | 46.99,29.21 46.99,41.91 45.72,43.18 TB1.5
  Top 0.254: 38.1,20.32 40.64,17.78 48.26,17.78 50.8,20.32 50.8,25.4 46.99,29.21
RXD
  Bottom 0.152: AT89C51RC2.10 49.53,156.21 49.53,163.83 48.26,165.1 JP2.2
SCK_CMOS
  Bottom 0.152: JP9.2 25.4,53.34 24.13,54.61 24.13,82.55 JP7.4
SCK_TTL
  Top 0.152: JP8.7 22.86,83.82 22.86,82.55 25.4,80.01 25.4,62.23 | JP10.3 25.4,62.23 | 25.4,62.23 29.21,58.42 29.21,49.53 45.72,33.02 TB1.9
SCLK  (via drill 0.35)
  Top 0.152: FLASH_MEMORY.4 71.12,119.38 v71.12,83.82 | v35.56,48.26 45.72,38.1 TB1.7
  Bottom 0.152: v71.12,83.82 v35.56,48.26
SDA_CMOS
  Bottom 0.152: JP9.3 25.4,49.53 26.67,50.8 26.67,82.55 JP7.5
SDA_TTL
  Top 0.152: JP8.6 22.86,81.28 JP10.2 22.86,55.88 | 26.92,49.28 45.72,30.48 TB1.10
  Top 0.254: 22.86,55.88 22.61,55.88 21.59,54.86 21.59,50.29 22.35,49.53 26.67,49.53 26.92,49.28
SW0
  Bottom 0.152: R10.1 16.51,154.94 15.24,156.21 15.24,161.29 | 15.24,161.29 16.51,162.56 SW4.1 | AT89C51RC2.3 19.05,171.45 15.24,167.64 15.24,161.29
SW1
  Top 0.152: R9.1 16.51,170.18 15.24,171.45 15.24,176.53 16.51,177.8 SW2.1
  Bottom 0.152: AT89C51RC2.4 17.78,168.91 R9.1
TXD
  Top 0.152: AT89C51RC2.11 39.37,151.13 JP3.2
UART51_RX_CMOS
  Bottom 0.152: JP3.3 26.67,146.05 24.13,146.05 7.62,129.54 7.62,26.67 16.51,17.78 31.75,17.78 33.02,19.05 33.02,24.13 JP21.5
UART51_RX_TTL  (via drill 0.35)
  Top 0.152: v25.4,27.94 19.05,27.94 JP22.6
  Bottom 0.152: v25.4,27.94 53.34,27.94 68.58,12.7 TB1.5_20
UART51_TX_CMOS  (via drill 0.35)
  Top 0.152: v31.75,143.51 31.75,160.02 JP2.3 | v20.32,34.29 JP21.6
  Bottom 0.152: v31.75,143.51 12.7,124.46 12.7,57.15 20.32,49.53 v20.32,34.29
UART51_TX_TTL
  Top 0.152: JP22.5 15.24,21.59 15.24,19.05 16.51,17.78 19.05,17.78 27.94,8.89 69.85,8.89 71.12,10.16 TB1.5_21
V_RES
  Top 0.152: R6.S@1 R6.S 109.22,109.22 JP12.3
VCC  (2 unrouted)
  Top 0.254: JP15.4 12.95,110.49 19.43,116.97 19.43,122.81 | 19.43,125.6 19.43,122.81 | 19.43,122.81 20.32,121.92 30.48,121.92 33.02,124.46 C20.1 | JP15.3 21.59,107.95 30.48,99.06 JP7.1 | JP21.1 34.29,36.83 35.56,35.56 35.56,27.94 43.18,20.32
  Top 0.305: JP15.2 JP15.4
  Top 0.406: 43.18,20.32 45.72,20.32
  Bottom 0.152: TB1.5_33 86.36,10.16 86.43,10.2 | 31.75,36.83 JP21.1 30.53,36.78
  pour Bottom (isolate 0.61): 2.54,190.5 193.04,190.5 193.04,2.54 2.54,2.54
VDD
  Top 0.152: TB1.5_35 88.9,10.16 88.9,12.7 TB1.5_36 | FLASH_MEMORY.6 83.82,137.16 90.17,137.16 102.87,149.86 | 109.22,156.21 102.87,149.86 | CIN.+ 109.22,156.21 | J1.1 121.92,151.13 116.84,156.21 109.22,156.21 | 102.87,149.86 102.87,167.64 U1.1
  Bottom 0.152: FLASH_MEMORY.6 74.93,41.91 88.9,27.94 88.9,12.7 TB1.5_36

## Text on the board
Top: Rajat Chaple | Dhiraj Bennadi | ESD Fall 21 | Remote | Interfacing | with 8051